# Altium PCB MOTHERBOARD.PcbDoc
Units mil, origin at the board's own origin, x right, y up, seen from the top; angles counter-clockwise.
Board outline 6000 x 4000 mil, 2 copper layers (Top Layer, Bottom Layer); 28 components, 82 nets, 157 pads, 0 vias.
Unrouted connection lines stored in the file: 63.
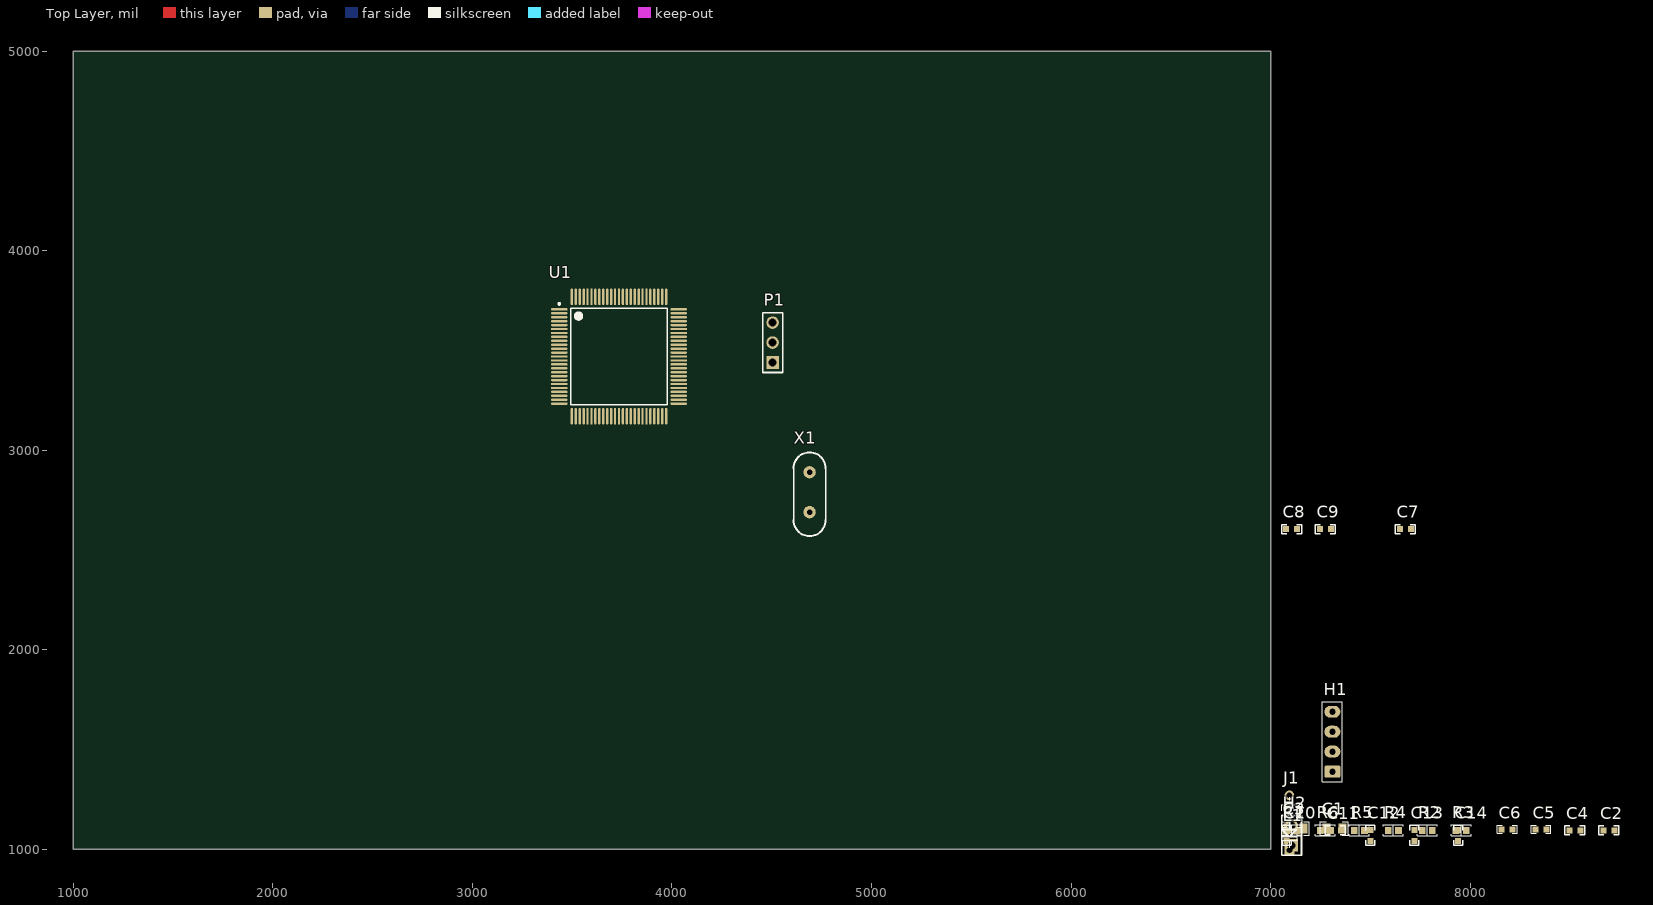
[diagram p0: Top Layer view]
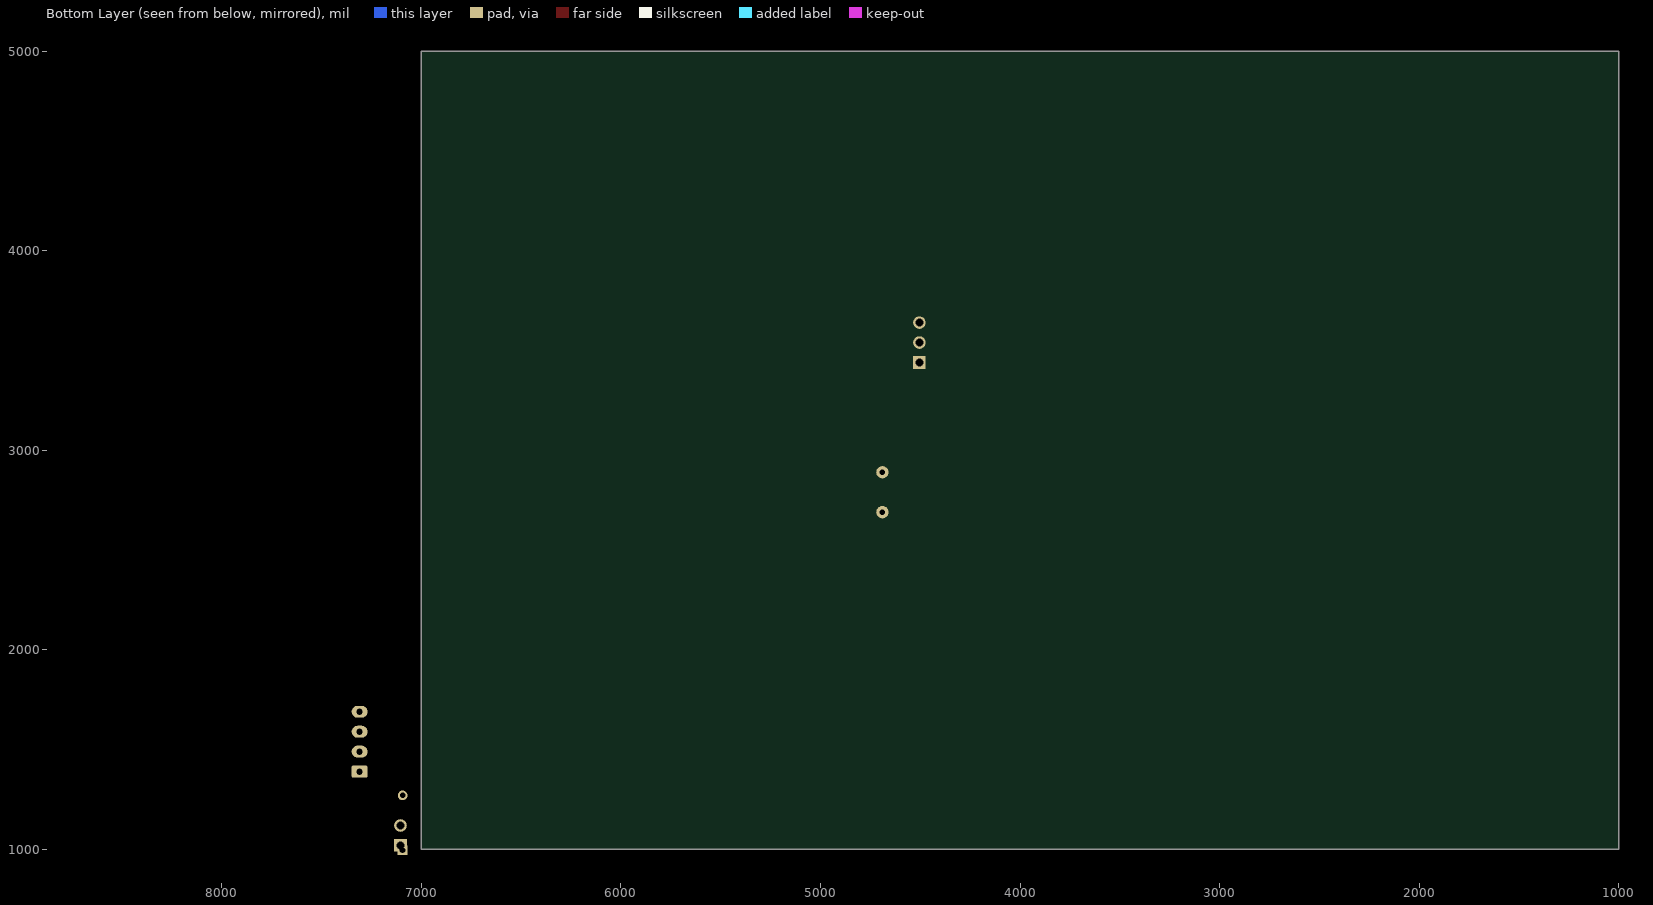
[diagram p1: Bottom Layer view, seen from below]

## Layer stack, top to bottom
Top Solder: solder mask 0.4, Solder Resist, Dk 3.5
Top Layer: signal copper 1.4
Dielectric 1: dielectric 12.6, FR-4, Dk 4.8
Bottom Layer: signal copper 1.4
Bottom Solder: solder mask 0.4, Solder Resist, Dk 3.5

## Board outline
1000,1000 7000,1000 7000,5000 1000,5000

## Design rules (kind name [scope] priority, off if disabled: settings)
Clearance [All] p1: gap=10 ignorepadtopadclearanceinfootprint=FALSE except(0: Arc-Hole Track-Hole SMDPad-Hole THPad-Hole Via-Hole Fill-Hole Poly-Hole Region-Hole Text-Hole)
PolygonConnect [All] p1: connectstyle=Relief reliefconductorwidth=10 reliefentries=4 polygonreliefangle="90 Angle" airgapwidth=10
RoutingVias [All] p1: holewidth=28 width=50 viastyle="Through Hole" minholewidth=28 minwidth=50 maxholewidth=28 maxwidth=50
SolderMaskExpansion [All] p1: expansion=4
Width [All] p1: maxlimit=10 minlimit=10 preferedwidth=10
30 further rules are at their usual default settings.

## Classes and differential pairs
channel class SENSOR: Sensor1 Sensor2
component class Power: J4
component class LCD: J1 J2
component class Debugger: H1 H2
component class Alarm: P1
channel class MOT_DRV: Motor1 Motor2

## Components (designator, comment, footprint, x,y, rotation, side; value= is the part's Value field where it differs from the comment)
C1 "Capacitor" 0805C-ST 7320,1105 r0 top value=1uF
C2 "Capacitor" "0603C ST" 8695,1095 r0 top value=100nF
C3 "Capacitor" 0805C-ST 7125,1105 r0 top value=10uF
C4 "Capacitor" "0603C ST" 8525,1095 r0 top value=100nF
C5 "Capacitor" 0603C-ST 8355,1100 r0 top value=2.2uF
C6 "Capacitor" 0603C-ST 8185,1100 r0 top value=2.2uF
C7 "100nF" "0603C ST" 7675,2605 r0 top value=10nF
C8 "20pF[N/A]" "0603C ST" 7105,2605 r0 top
C9 "20pF[N/A]" "0603C ST" 7275,2605 r0 top
C10 "Capacitor" "0603C ST" 7080,1070 r90 top value=100nF
C11 "Capacitor" "0603C ST" 7325,1095 r0 top value=100nF
C12 "Capacitor" "0603C ST" 7500,1070 r90 top value=100nF
C13 "Capacitor" "0603C ST" 7720,1070 r90 top value=100nF
C14 "Capacitor" "0603C ST" 7940,1070 r90 top value=100nF
H1 "Programmer" HDR1X4_2.54MMP 7310,1390 r90 top
H2 "Header" HDR1X2 7105,1020 r90 top
J1 "PRPC011SFAN-RC" 1N4148 7095,1135 r90 top
L1 "BEAD" 0603L-ST 7105,1090 r0 top value=600R@100MHz
P1 "Header 3" HDR1X3 4505,3440 r90 top
R1 "Resistor" 0603R 7105,1095 r0 top value=0R
R2 "Resistor" 0603R 7785,1095 r0 top value=10K
R3 "N/A" 0603R 7955,1095 r0 top value=10K
R4 "Resistor" 0603R 7615,1095 r0 top value=1K5
R5 "Resistor" 0603R 7445,1095 r0 top value=1K5
R6 "Resistor" 0603R 7275,1095 r0 top value=1K5
R7 "Resistor" 0603R 7105,1095 r0 top value=1K5
U1 "" LQFP100_M 3735,3470 r0 top value=STM32H750XBH6
X1 "8MHz(16pF)[N/A]" XTAL1 4689.8,2690.36 r90 top

## Footprints (in the part's own frame and the unit in brackets; to place one, negate y for a bottom-side part, rotate by r counter-clockwise, add the part's x,y. Pads: shape width x height; smd on the part's side, far side on the other; paste and mask are expansions set on the pad)
1N4148 [mil]
  round 48.74 hole 28.74: 1(136,1)
  rect 48.74x48.74 hole 28.74: 2(-139,0)
  silkscreen extent -126,-38 126,38, body extent -148,-38 147,40, height 118
"0603C ST" [mil]
  rect 30x30 smd: 1(27.5,0) 2(-27.5,0)
  silkscreen extent -50,-22 50,23, body extent -31,-16 31,16, height 32
0603C-ST [mil]
  rect 30x30 smd mask+4: 1(27.56,0.28) 2(-27.44,0.28)
  silkscreen extent -50,-20 50,20, body extent -31,-16 32,16, height 32
0603L-ST [mil]
  rect 30x30 smd mask+4: 1(27.5,0) 2(-27.5,0)
  silkscreen extent -50,-20 50,20
0603R [mm]
  rect 0.85x0.95 smd: 1(-0.65,0) 2(0.65,0)
  silkscreen extent -1.27,-0.7 1.27,0.7, body extent -0.8,-0.4 0.8,0.4, height 0.45
0805C-ST [mil]
  rect 40x50 smd mask+4: 1(40,0) 2(-40,0)
  silkscreen extent -70,-35 70,35
HDR1X2 [mm] "Connector; Header; 2 Position"
  rect 1.6x1.6 hole 1: 1(0,0)
  round 1.6 hole 1: 2(2.54,0)
  silkscreen extent -1.27,-1.27 3.81,1.27, body extent -1.24,-1.24 3.84,1.3, height 8.44
HDR1X3 [mm] "Connector; Header; 3 Position"
  rect 1.6x1.6 hole 1: 1(0,0)
  round 1.6 hole 1: 2(2.54,0) 3(5.08,0)
  silkscreen extent -1.27,-1.27 6.35,1.27, body extent -1.21,-1.3 6.41,1.24, height 8.38
HDR1X4_2.54MMP [mil] "Connector; Header; 4 Position 0.100\" pitch"
  rrect25% 60x80 hole 32: 1(0,0)
  oval 60x80 hole 32: 2(100,0) 3(200,0) 4(300,0)
  silkscreen extent -50,-50 350,50
LQFP100_M [mm] "Thin QFP, 100-Leads, Body 14x14mm, Pitch 0.5mm, IPC Low Density"
  oval 2.1x0.3 smd: 1(-7.6,6) 2(-7.6,5.5) 3(-7.6,5) 4(-7.6,4.5) 5(-7.6,4) 6(-7.6,3.5) 7(-7.6,3) 8(-7.6,2.5) 9(-7.6,2) 10(-7.6,1.5) 11(-7.6,1) 12(-7.6,0.5) 13(-7.6,0) 14(-7.6,-0.5) 15(-7.6,-1) 16(-7.6,-1.5) 17(-7.6,-2) 18(-7.6,-2.5) 19(-7.6,-3) 20(-7.6,-3.5) 21(-7.6,-4) 22(-7.6,-4.5) 23(-7.6,-5) 24(-7.6,-5.5) 25(-7.6,-6) 51(7.6,-6) 52(7.6,-5.5) 53(7.6,-5) 54(7.6,-4.5) 55(7.6,-4) 56(7.6,-3.5) 57(7.6,-3) 58(7.6,-2.5) 59(7.6,-2) 60(7.6,-1.5) 61(7.6,-1) 62(7.6,-0.5) 63(7.6,0) 64(7.6,0.5) 65(7.6,1) 66(7.6,1.5) 67(7.6,2) 68(7.6,2.5) 69(7.6,3) 70(7.6,3.5) 71(7.6,4) 72(7.6,4.5) 73(7.6,5) 74(7.6,5.5) 75(7.6,6)
  oval 0.3x2.1 smd: 26(-6,-7.6) 27(-5.5,-7.6) 28(-5,-7.6) 29(-4.5,-7.6) 30(-4,-7.6) 31(-3.5,-7.6) 32(-3,-7.6) 33(-2.5,-7.6) 34(-2,-7.6) 35(-1.5,-7.6) 36(-1,-7.6) 37(-0.5,-7.6) 38(0,-7.6) 39(0.5,-7.6) 40(1,-7.6) 41(1.5,-7.6) 42(2,-7.6) 43(2.5,-7.6) 44(3,-7.6) 45(3.5,-7.6) 46(4,-7.6) 47(4.5,-7.6) 48(5,-7.6) 49(5.5,-7.6) 50(6,-7.6) 76(6,7.6) 77(5.5,7.6) 78(5,7.6) 79(4.5,7.6) 80(4,7.6) 81(3.5,7.6) 82(3,7.6) 83(2.5,7.6) 84(2,7.6) 85(1.5,7.6) 86(1,7.6) 87(0.5,7.6) 88(0,7.6) 89(-0.5,7.6) 90(-1,7.6) 91(-1.5,7.6) 92(-2,7.6) 93(-2.5,7.6) 94(-3,7.6) 95(-3.5,7.6) 96(-4,7.6) 97(-4.5,7.6) 98(-5,7.6) 99(-5.5,7.6) 100(-6,7.6)
  silkscreen extent -7.72,-6.15 6.15,6.82, body extent -8.31,-8.31 8.31,8.31, height 2.6
XTAL1 [mil]
  round 62 hole 28: 1(-0.36,-0.2) 2(199.64,-0.2)
  silkscreen extent -120,-80 300,80, body extent -120,-89 312,88, height 59

## Part data
C1 C3: library part MCD-00014, "Capacitor, MLCC, 10uF, 25V, X5R, 10%, 0805, T=0,85mm", Manufacturer=YAGEO, Manufacturer_Part_Number=CC0805KRX5R8BB106, Package=C0805, ComponentLink1Description=Yageo_Capacitor_X5R-series.pdf, ComponentLink1URL=http://tunmcdsvn.tun.st.com/Component_Datasheet_Library/Trunk/Capacitors/Yageo_Capacitor_X5R-series.pdf, ECCN_EU=n/a, ECCN_US=n/a, Initial_Board_Reference=mb1274, Internal_Part_Number=MCD-00014, Part_Type=Capacitor, Provided_By=Subcon, Status=Released
C2 C4 C10 C11 C12 C13 C14: library part MCD-00102, "Capacitor, MLCC, 100nF, 16V, X7R, 10%, 0402, T=0,5mm", Manufacturer=YAGEO, Manufacturer_Part_Number=CC0402KRX7R7BB104, Package=C0402, ComponentLink1Description=Yageo_Capacitor_X7R-series.pdf, ComponentLink1URL=http://tunmcdsvn.tun.st.com/Component_Datasheet_Library/Trunk/Capacitors/Yageo_Multilayer_Capacitor_X7R_series_100pF_to_22uF, ECCN_EU=n/a, ECCN_US=n/a, Initial_Board_Reference=MB1262, Internal_Part_Number=MCD-00102, Part_Type=Capacitor, Provided_By=Subcon, Status=Released
C5 C6: library part MCD-00012, "Capacitor, MLCC, 2.2uF, 10V, X5R, 10%, 0603, T=0,8mm", Alternate_Manufacturer=KEMET, Alternate_Manufacturer_Part_Number=C0603C225K8PACTU, Manufacturer=YAGEO, Manufacturer_Part_Number=CC0603KRX5R6BB225, Package=C0603, ComponentLink1Description=Yageo_Capacitor_X5R-series.pdf, ComponentLink1URL=http://tunmcdsvn.tun.st.com/Component_Datasheet_Library/Trunk/Capacitors/Yageo_Multilayer_capacitor_X5R_series_100pF_to_100uF, ECCN_EU=n/a, ECCN_US=n/a, Initial_Board_Reference=MB1274, Internal_Part_Number=MCD-00012, Part_Type=Capacitor, Provided_By=Subcon, Status=Released
C7: library part Cap, "Capacitor", Published=8-Jun-2000, Publisher="Altium Limited", Revision="July-2002: Re-released for DXP Platform."
C8 C9: library part CAP, "Capacitor"
H1: library part Header4P_1, "Header 4-pin"
H2: library part Header2P, "Header, 2-pin"
J1: "Connector", Manufacturer_Name=Sullins, Datasheet Link=https://media.digikey.com/PDF/Data%20Sheets/Sullins%20PDFs/xRxCzzzSxxN-RC_ST_11635-B.pdf, Height=10.58mm, Manufacturer_Part_Number=PRPC011SFAN-RC
L1: library part MCD-00047, "SMD Chip ferrite bead, 600R@100MHz +/-25%, 350mA, 500mohm DC, 0603, T=0.8mm", Manufacturer=TAI-TECH, Manufacturer_Part_Number=FCM1608KF-601T03, ComponentLink1Description=TaiTech_Bead_FCM1608_series.pdf, ComponentLink1URL=http://tunmcdsvn.tun.st.com/Component_Datasheet_Library/Trunk/Inductors/TaiTech_Bead_FCM1608_series, ECCN_EU=n/a, ECCN_US=n/a, Initial_Board_Reference=MB1274, Internal_Part_Number=MCD-00047, Part_Type=Inductor, Provided_By=Subcon, Status=Released
P1: "Header, 3-Pin", LatestRevisionDate=17-Jul-2002, LatestRevisionNote="Re-released for DXP Platform.", Publisher="Altium Limited"
R1: library part MCD-00181, "Resistor,0R,0603,ULO", Manufacturer=ROHM, Manufacturer_Part_Number=PMR03EZPJ000, Package=R0603, ComponentLink1Description="ROHM_ULtra low Ohmic Resistor _PMR10EZPJ000.pdf", ComponentLink1URL="http://tunmcdsvn.tun.st.com/Component_Datasheet_Library/Trunk/Resistors/ROHM_ULtra low Ohmic Resistor _PMR10EZPJ000.pdf", ECCN_EU=n/a, ECCN_US=n/a, Internal_Part_Number=MCD-00181, Part_Type=Resistor, Provided_By=Subcon, Status=Released
R2 R3: library part MCD-00053, "Resistor,10K,0402,1%,1/16W", Manufacturer=YAGEO, Manufacturer_Part_Number=RC0402FR-0710KL, Package=R0402, ComponentLink1Description=Yageo_Resistor_RC0402-series.pdf, ComponentLink1URL=http://tunmcdsvn.tun.st.com/Component_Datasheet_Library/Trunk/Resistors/Yageo_Resistor_RC0402-series, ECCN_EU=n/a, ECCN_US=n/a, Initial_Board_Reference=MB1274, Internal_Part_Number=MCD-00053, Part_Type=Resistor, Provided_By=subcon, Status=Released
R4 R5 R6 R7: library part MCD-00068, "Resistor,1K5,0402,1%,1/16W", Manufacturer=YAGEO, Manufacturer_Part_Number=RC0402FR-071K5L, Package=R0402, ComponentLink1Description=Datasheet, ComponentLink1URL=http://tunmcdsvn.tun.st.com/Component_Datasheet_Library/Trunk/Resistors/Yageo_Resistor_RC0402-series, Initial_Board_Reference=MB1274, Internal_Part_Number=MCD-00068, Part_Type=Resistor, Provided_By=Subcon, Status=Released
U1: "32bit MCU TFBGA240+25", Manufacturer=STMICROELECTRONICS, Manufacturer_Part_Number=STM32H745XIH6, Package=TFBGA265, ComponentLink1Description=Datasheet, ComponentLink1URL=http://tunmcdsvn.tun.st.com/Component_Datasheet_Library/Trunk/IC/STM_MCU_STM32H745H6U_TFBGA265/STM_MCU_STM32H745H6U_TFBGA265.pdf, Initial_Board_Reference=MB1381, Internal_Part_Number=MCD-01085, Part_Type=IC, Provided_By=STM, Status="Footprint available"
X1: library part CRYSTAL, "Crystal"

## Nets (pads, with @x,y where several pads share a name; then routed paths per layer and width w, separated by ;. In a path a pad name is that pad's centre, name@x,y a point inside that pad or via, vN(x,y) a via of type N, cw(c..) or ccw(c..) an arc to the next point about the centre after c; other vN are vias at no path point)
+3V3: C10.2 C11.2 C12.2 C13.2 C14.2 L1.1 R3.1 R4.2 R5.2 R6.2 R7.2 U1.6 U1.11 U1.27 U1.50 U1.75 U1.100
+5V: 
+12V: 
+48_PROT: 
A0_LCD: U1.41
A_LCD: U1.42
ADD: U1.84
BOOT0: R2.1 R3.2 U1.94
CANCEL: U1.95
CLK16_Motor1: 
CLK16_Motor2: 
CS_LCD: U1.47
CSN_Motor1: U1.55
CSN_Motor2: U1.51
DIAG0_Motor1: U1.79
DIAG0_Motor2: U1.81
DIAG1_Motor1: U1.80
DIAG1_Motor2: U1.82
DRV_ENN_Motor1: 
DRV_ENN_Motor2: 
FDCAN1_RX: U1.70
FDCAN1_TX: U1.71
GND: C1.1 C2.1 C3.1 C4.1 C5.1 C6.1 C7.2 C8.1 C9.1 C10.1 C11.1 C12.1 C13.1 C14.1 H1.2 R2.2 U1.10 U1.19 U1.26 U1.49 U1.74 U1.99
GPIO_1: U1.5
GPIO_2: U1.4
GPIO_3: U1.3
GPIO_4: U1.2
GPIO_5: U1.1
GPIO_6: U1.98
GPIO_7: U1.97
GPIO_8: U1.83
I:E: U1.15
IIC1_SCL: R5.1 U1.92
IIC1_SDA: R4.1 U1.93
IIC4_SCL: R7.1 U1.59
IIC4_SDA: R6.1 U1.60
K_LCD: U1.25
LCD_B2: U1.66
LCD_B3: U1.57
LCD_B7: U1.96
LCD_BL: U1.32
LCD_CLK: U1.44
LCD_DE: U1.43
LCD_DISP: U1.16
LCD_G2: U1.30
LCD_G4: U1.46
LCD_G6: U1.64
LCD_HSYNC: U1.63
LCD_INT: U1.17
LCD_R2: J1.1 U1.78
LCD_R3: J1.2 U1.34
LCD_R4: U1.29
LCD_R6: U1.35
LCD_R7: U1.45
LCD_RST: U1.18
LCD_VSYNC: U1.28
NetC5_2: C5.2 U1.48
NetC6_2: C6.2 U1.73
NetC8_2: C8.2 U1.12 X1.1
NetC9_2: C9.2 U1.13 X1.2
NRST: C7.1 H1.4 U1.14
REFL_Motor1: 
REFL_Motor2: 
REFR_Motor1: 
REFR_Motor2: 
SCK_Motor1: U1.52
SDI_Motor1: U1.54
SDO_Motor1: U1.53
SPI1_MISO: U1.90
SPI1_MOSI: U1.88
SPI1_SCK: U1.89
SWCLK: H1.3 U1.76
SWDIO: H1.1 U1.72
TIM1_CH1: P1.1 U1.67
TIM1_CH2: P1.2 U1.68
TIM1_CH3: P1.3 U1.69
UART2_RX: U1.87
UART2_TX: U1.86
UART4_RX: H2.2 U1.23
UART4_TX: H2.1 U1.22
VDDA: C1.2 C2.2 L1.2 R1.1 U1.21
VREF+: C3.2 C4.2 R1.2 U1.20
pads on no net: U1.7 U1.8 U1.9 U1.24 U1.31 U1.33 U1.36 U1.37 U1.38 U1.39 U1.40 U1.56 U1.58 U1.61 U1.62 U1.65 U1.77 U1.85 U1.91